# Altium PCB POWER.PcbDoc
Units mm, origin at the board's own origin, x right, y up, seen from the top; angles counter-clockwise.
Board outline 152.4 x 101.6 mm, 2 copper layers (Top Layer, Bottom Layer); 27 components, 25 nets, 139 pads, 20 vias.
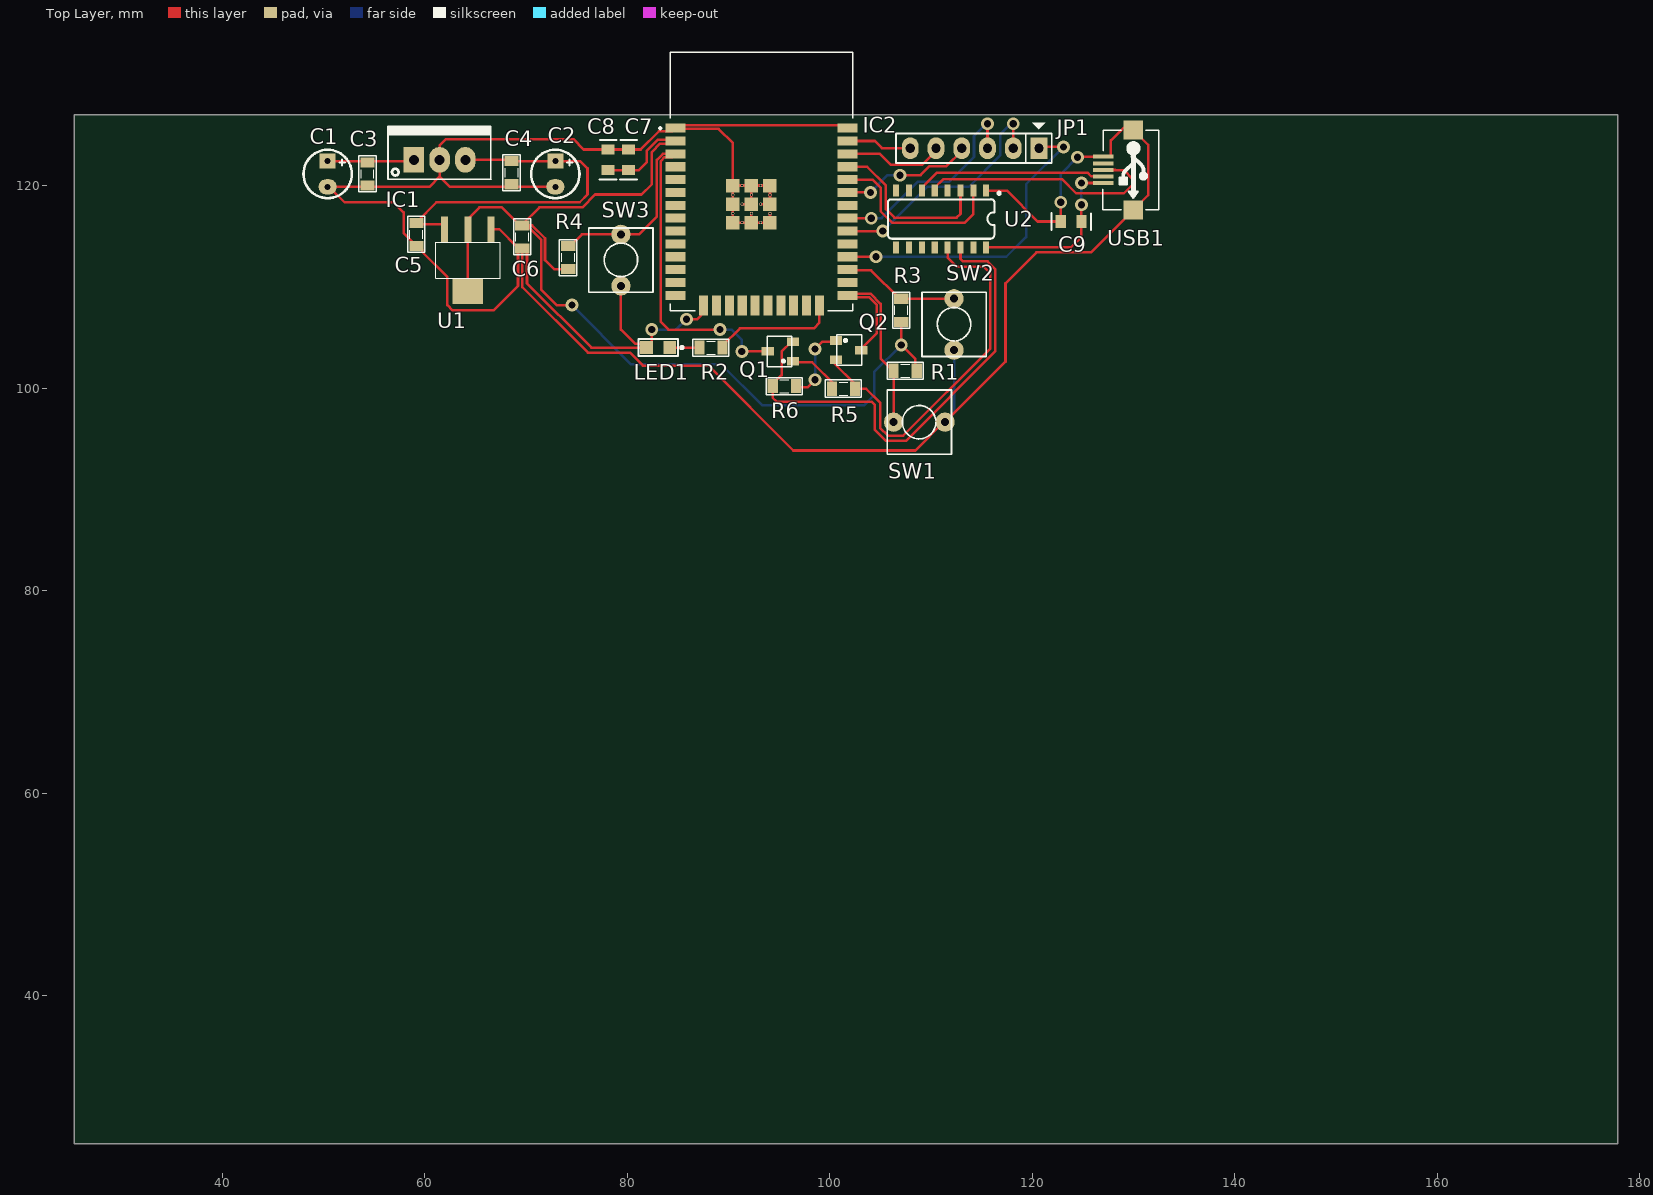
[diagram p0: Top Layer view]
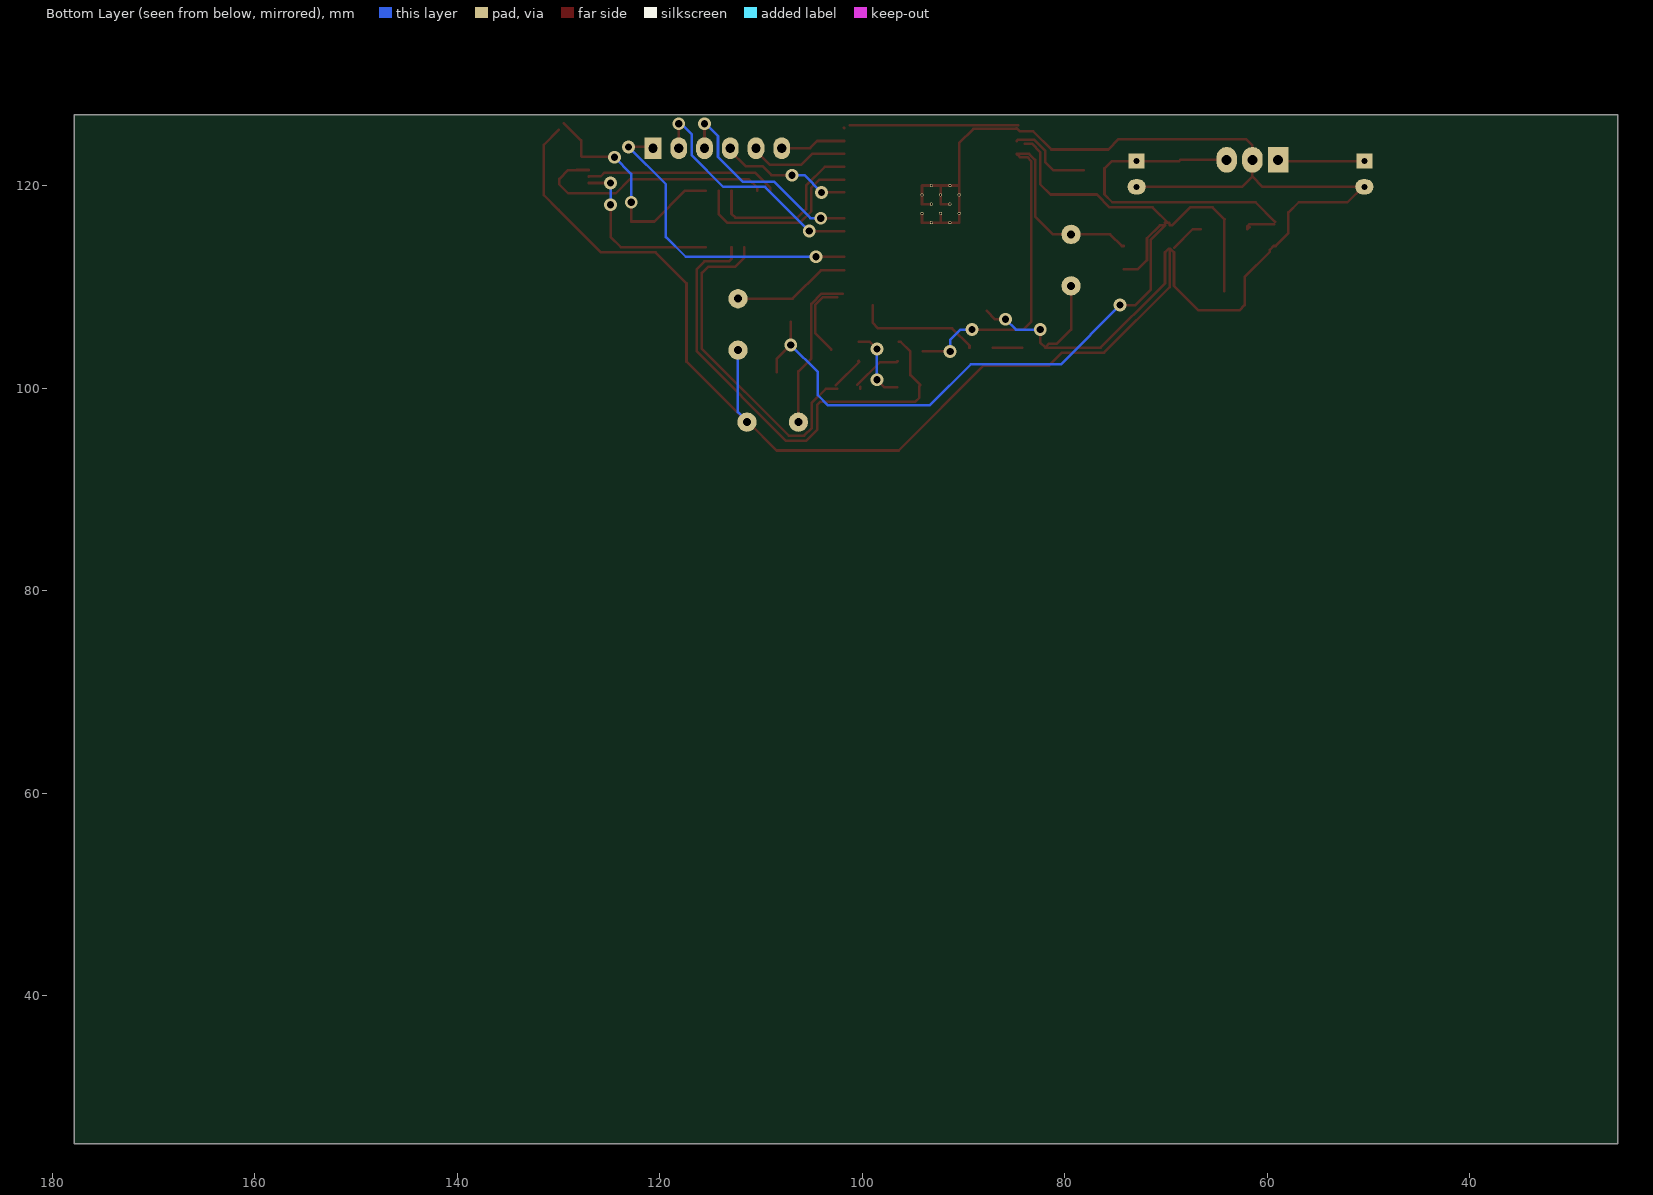
[diagram p1: Bottom Layer view, seen from below]
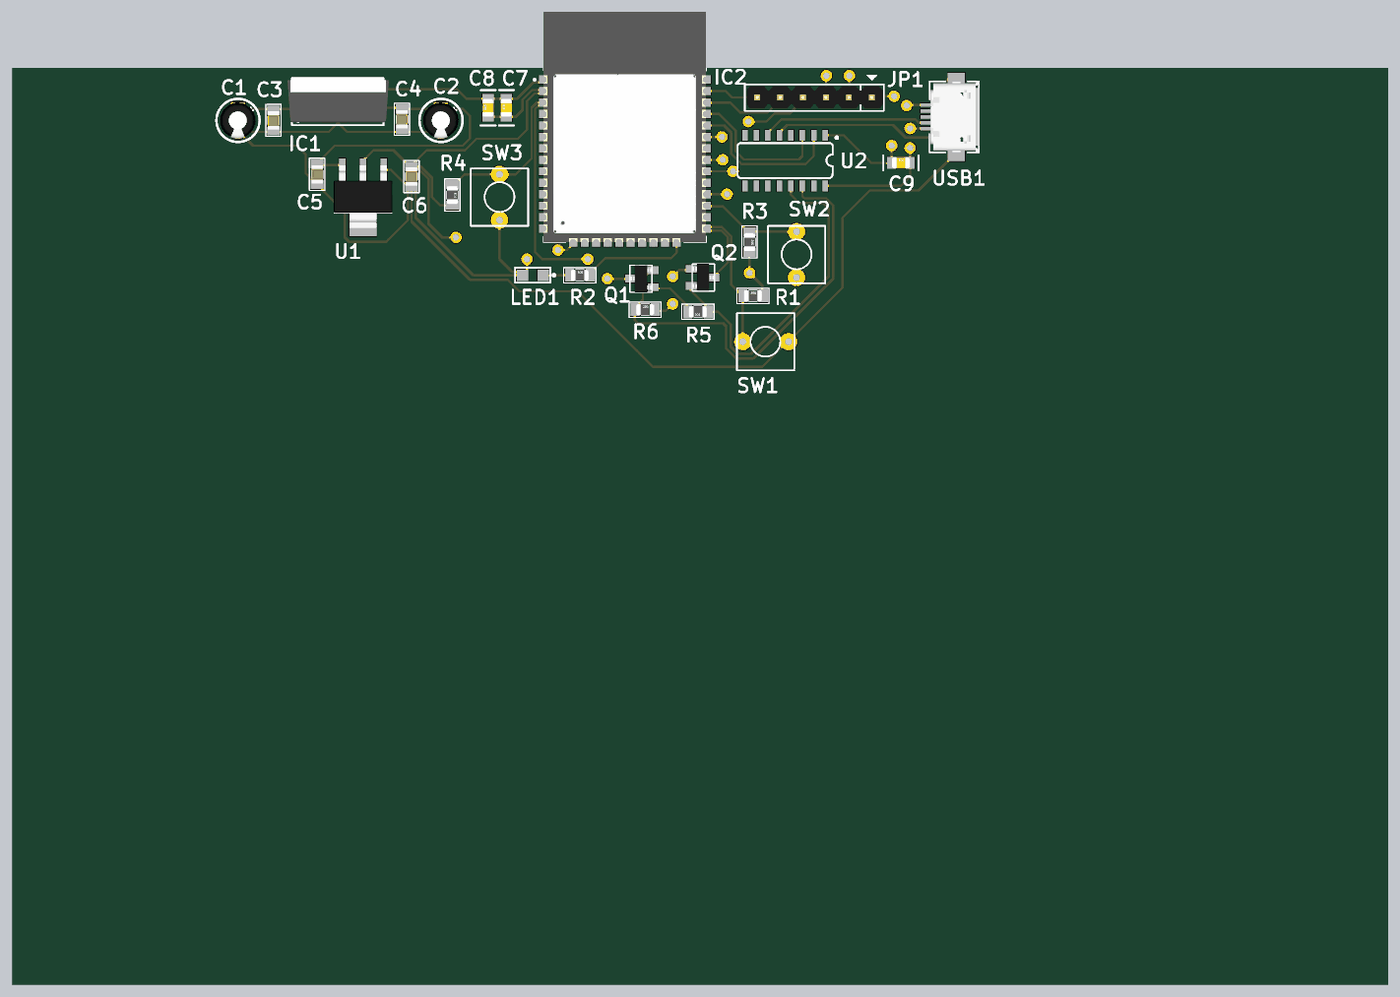
[diagram p2: 3D render of the assembled board from above, using the file's embedded part models]

## Layer stack, top to bottom
Top Solder: solder mask 0.0102, Solder Resist, Dk 3.5
Top Layer: signal copper 0.0356
Dielectric 1: dielectric 0.32, FR-4, Dk 4.8
Bottom Layer: signal copper 0.0356
Bottom Solder: solder mask 0.0102, Solder Resist, Dk 3.5

## Board outline
25.4,25.4 177.8,25.4 177.8,127 25.4,127

## Design rules (kind name [scope] priority, off if disabled: settings)
Clearance [All] p1: gap=0.254 ignorepadtopadclearanceinfootprint=FALSE except(0: Arc-Hole Track-Hole SMDPad-Hole THPad-Hole Via-Hole Fill-Hole Poly-Hole Region-Hole Text-Hole)
DiffPairsRouting [All] p1: maxlimit=0.254 minlimit=0.254 mostfreqgap=0.254 toplayer_minwidth=0.381 toplayer_maxwidth=0.381 toplayer_prefwidth=0.381 bottomlayer_minwidth=0.381 bottomlayer_maxwidth=0.381 bottomlayer_prefwidth=0.381 maxuncoupledlength=12.7
PolygonConnect [All] p1: connectstyle=Relief reliefconductorwidth=0.254 reliefentries=4 polygonreliefangle="90 Angle" airgapwidth=0.254
RoutingVias [All] p1: holewidth=0.711 width=1.27 viastyle="Through Hole" minholewidth=0.711 minwidth=1.27 maxholewidth=0.711 maxwidth=1.27
SolderMaskExpansion [All] p1: expansion=0.102 istentingtop=FALSE
Width [All] p1: maxlimit=0.254 minlimit=0.254 preferedwidth=0.254
29 further rules are at their usual default settings.

## Classes and differential pairs
differential pair class diff: D0
component class MCU: C7 C8 C9 IC2 JP1 LED1 Q1 Q2 R1 R2 R3 R4 R5 R6 SW1 SW2 SW3 U2 USB1
component class POWER: C1 C2 C3 C4 C5 C6 IC1 U1
differential pair D0: +D0_P -D0_N

## Components (designator, comment, footprint, x,y, rotation, side; value= is the part's Value field where it differs from the comment)
C1 "25V/10uF" C3MM 50.419,121.158 r270 top
C2 "10V/1uF" C3MM 72.898,121.158 r270 top
C3 "100nF" CAP_0805 54.356,121.158 r270 top value=33p
C4 "100nF" CAP_0805 68.58,121.285 r270 top value=33p
C5 "10uF" CAP_0805 59.182,115.189 r270 top value=33p
C6 "22uF" CAP_0805 69.632,114.935 r270 top value=33p
C7 "10uF" C0805 80.137,122.555 r90 top value=33p
C8 "10uF" C0805 78.105,122.555 r90 top value=33p
C9 "100nF" C0805 123.825,116.459 r0 top value=33p
IC1 "LM7805" QTO-220 58.928,122.555 r0 top
IC2 "ESP32-WROOM-32" MODULE_ESP32-WROOM-32 93.259,120.42 r0 top
JP1 "JP6 PIN" JP6 120.65,123.698 r180 top value=JP7
LED1 "LED" LED0805 83.058,104.013 r180 top value="LED 3 ly Single Colour"
Q1 "C1815" SOT23D 95.123,103.632 r90 top
Q2 "C1815" SOT23D 101.854,103.759 r270 top
R1 "10k" RES-SMD-0805 107.442,101.727 r0 top
R2 "Resistor - SMD" RES-SMD-0805 88.265,104.013 r0 top
R3 "10k" RES-SMD-0805 107.061,107.696 r270 top
R4 "10k" RES-SMD-0805 74.168,112.903 r270 top
R5 "10k" RES-SMD-0805 101.346,99.949 r180 top
R6 "10k" RES-SMD-0805 95.504,100.203 r0 top
SW1 "SW" SW2 106.299,96.647 r0 top value="SW chip 2 pin"
SW2 "SW" SW2 112.268,108.839 r270 top value="SW chip 2 pin"
SW3 "SW" SW2 79.375,115.189 r270 top value="SW chip 2 pin"
U1 "LM1117-ADJ" LM1117-SOP 64.262,114.427 r180 top
U2 "CH340C" SOP-16 110.998,116.707 r180 top
USB1 "USB" USB-M1 127,121.554 r270 top

## Footprints (in the part's own frame and the unit in brackets; to place one, negate y for a bottom-side part, rotate by r counter-clockwise, add the part's x,y. Pads: shape width x height; smd on the part's side, far side on the other; paste and mask are expansions set on the pad)
C3MM [mm]
  rect 1.5x1.58 hole 0.6: 1(-1.27,0)
  oval 1.5x1.8 hole 0.6: 2(1.27,0)
  silkscreen extent -2.39,-2.39 2.39,2.39, body extent -2,-2.03 1.99,1.97, height 7.01
C0805 [mm] "Chip Resistor; Body 2.0 x 1.3 mm (LxW typ)"
  rect 1x1.27 smd: 1(-1.016,0) 2(1.016,0)
  silkscreen extent -1.96,-0.84 1.96,0.84, body extent -1,-0.62 1,0.63, height 0.78
CAP_0805 [mil]
  rect 39.37x55 smd: 1(-45,0) 2(45,0)
  silkscreen extent -70,-34 70,33, body extent -40,-25 40,25, height 24
JP6 [mil] "JP6"
  rect 65x85 hole 36: 1(0,0)
  oval 65x85 hole 36: 2(100,0) 3(200,0) 4(300,0) 5(400,0) 6(500,0)
  silkscreen extent -50,-99 556,58, body extent -48,-50 548,48, height 323
LED0805 [mil] "Chip Resistor; Body 2.0 x 1.3 mm (LxW typ)"
  rect 50x50 smd: 1(-45,0) 2(45,0)
  silkscreen extent -97,-33 77,33, body extent -60,-25 60,25, height 47
LM1117-SOP [mm]
  rect 0.7x2.54 smd: 1(-2.3,-1.27) 2(0,-1.27) 3(2.3,-1.27)
  rect 3x2.54 smd: 2(0,4.826)
  silkscreen extent -3.18,0 3.17,3.56, body extent -3.25,-1.78 3.25,5.18, height 1.68
MODULE_ESP32-WROOM-32 [mm]
  rect 2x0.9 smd: 1(-8.5,5.26) 2(-8.5,3.99) 3(-8.5,2.72) 4(-8.5,1.45) 5(-8.5,0.18) 6(-8.5,-1.09) 7(-8.5,-2.36) 8(-8.5,-3.63) 9(-8.5,-4.9) 10(-8.5,-6.17) 11(-8.5,-7.44) 12(-8.5,-8.71) 13(-8.5,-9.98) 14(-8.5,-11.25) 25(8.5,-11.25) 26(8.5,-9.98) 27(8.5,-8.71) 28(8.5,-7.44) 29(8.5,-6.17) 30(8.5,-4.9) 31(8.5,-3.63) 32(8.5,-2.36) 33(8.5,-1.09) 34(8.5,0.18) 35(8.5,1.45) 36(8.5,2.72) 37(8.5,3.99) 38(8.5,5.26)
  rect 0.9x2 smd: 15(-5.715,-12.25) 16(-4.445,-12.25) 17(-3.175,-12.25) 18(-1.905,-12.25) 19(-0.635,-12.25) 20(0.635,-12.25) 21(1.905,-12.25) 22(3.175,-12.25) 23(4.445,-12.25) 24(5.715,-12.25)
  rect 1.33x1.33 smd: 39_1(-2.835,-0.405) 39_2(-1,-0.405) 39_3(0.835,-0.405) 39_4(-2.835,-2.24) 39_5(-1,-2.24) 39_6(0.835,-2.24) 39_7(-2.835,-4.075) 39_8(-1,-4.075) 39_9(0.835,-4.075)
  round 0.3 hole 0.2: 39_10(-1.917,-0.405) 39_11(-0.082,-0.405) 39_12(-2.835,-1.322) 39_13(-1,-1.322) 39_14(0.835,-1.322) 39_15(-1.917,-2.24) 39_16(-0.082,-2.24) 39_17(-2.835,-3.157) 39_18(-1,-3.157) 39_19(0.835,-3.157) 39_20(-1.917,-4.075) 39_21(-0.082,-4.075)
  silkscreen extent -10.1,-12.75 9,12.75, body extent -9.02,-12.75 8.98,12.75, height 3.2
QTO-220 [mil] "TO-220 - 1-2-3"
  rect 80x100 hole 39: 1(0,0)
  oval 80x100 hole 39: 2(100,0) 3(200,0)
  silkscreen extent -100,-76 300,130, body extent -119,-64 322,121, height 755
RES-SMD-0805 [mil]
  rect 39.37x55 smd: 1(-45,0) 2(45,0)
  silkscreen extent -70,-34 70,33, body extent -39,-25 39,25, height 31
SOP-16 [mm]
  rect 0.6x1.2 smd: 1(-4.445,-2.8) 2(-3.175,-2.8) 3(-1.905,-2.8) 4(-0.635,-2.8) 5(0.635,-2.8) 6(1.905,-2.8) 7(3.175,-2.8) 8(4.445,-2.8) 9(4.445,2.8) 10(3.175,2.8) 11(1.905,2.8) 12(0.635,2.8) 13(-0.635,2.8) 14(-1.905,2.8) 15(-3.175,2.8) 16(-4.445,2.8)
  silkscreen extent -5.84,-2.67 5.26,1.95, body extent -4.95,-3.47 4.95,3.47, height 1.75
SOT23D [mm] "SOT 23C - 1-3-2 - BCE"
  rect 0.85x1.2 smd: 1(-0.95,-1.25) 2(0.94,-1.245) 3(0,1.25)
  silkscreen extent -1.5,-1.14 1.5,1.32, body extent -1.5,-1.17 1.5,1.33, height 1.06
SW2 [mil] "SW button 2pin, 250x 250 mil"
  round 75 hole 31: 1(0,0) 2(200,0)
  silkscreen extent -25,-125 225,125
USB-M1 [mm]
  rect 0.4x2 smd: 1(1.3,0) 2(0.65,0) 3(0,0) 4(-0.65,0) 5(-1.321,0)
  rect 1.9x1.9 smd: 5(-3.95,2.968) 5(3.95,2.968)
  silkscreen extent -3.94,-0.03 3.94,5.46, body extent -3.98,0.11 4,5.54, height 2.71

## Part data
C1 C2: library part "Cap Pol", "Polarized Capacitor (Axial)", LatestRevisionDate=17-Jul-2002, LatestRevisionNote="Re-released for DXP Platform.", PackageReference=POLAR0.8, Published=8-Jun-2000, Publisher="Altium Limited"
C3 C4 C5 C6 C7 C8 C9: library part CapSMD, "Capacitor", LatestRevisionDate=17-Jul-2002, LatestRevisionNote="Re-released for DXP Platform.", PackageReference=RAD-0.3, Published=8-Jun-2000, Publisher="Altium Limited"
IC1: library part LM78xx, "On ap +, from + 5 to + 24VDC"
IC2: "Bluetooth, WiFi Transceiver Module 2.4GHz ~ 2.5GHz Surface Mount", Package="Module Espressif Systems", Digi-Key_Part_Number=1904-1010-1-ND, Digi-Key_Purchase_URL=https://www.digikey.com/product-detail/en/espressif-systems/ESP32-WROOM-32/1904-1010-1-ND/8544305?utm_source=snapeda&utm_medium=aggregator&utm_campaign=symbol, MF="Espressif Systems", MP=ESP32-WROOM-32, SnapEDA_Link=https://www.snapeda.com/parts/ESP32-WROOM-32/Espressif%20Systems/view-part/2753322/?ref=snap
JP1: library part JP6
LED1: "LED Single colour Green and Red"
Q1 Q2: library part 2SC1815, "NPN 600mW, ECB"
R1 R3 R4 R5 R6: library part "Resistor - SMD", "Resistor", Manufacturer="Generic Components", Class=Passive, Published=08/06/2000, Publisher="Altium Hobart Technology Centre"
R2: "Resistor SMD", Manufacturer="Generic Components", Class=Passive, Published=08/06/2000, Publisher="Altium Hobart Technology Centre"
SW1 SW2 SW3: library part SW2, "Switch button 2 pin"
U1: "800mA Low-Dropout Linear Regulator", Creator="Nguyen Ba Bien", Website=http://group3i.net
U2: "USB to serial chip CH340", Package=Package, Availability=Unavailable, Check_prices=https://www.snapeda.com/parts/CH340C/WCH/view-part/5428851/?ref=eda, MF=WCH, MP=CH340C, Price=None, SnapEDA_Link=https://www.snapeda.com/parts/CH340C/WCH/view-part/5428851/?ref=snap
USB1: library part USB-M

## Via types
v1: diameter 1.27, hole 0.711, Top Layer to Bottom Layer, 20 vias

## Nets (pads, with @x,y where several pads share a name; then routed paths per layer and width w, separated by ;. In a path a pad name is that pad's centre, name@x,y a point inside that pad or via, vN(x,y) a via of type N, cw(c..) or ccw(c..) an arc to the next point about the centre after c; other vN are vias at no path point)
3V3: C6.1 C7.1 C8.1 IC2.2 R1.2 R3.2 R4.2 U1.2 | length 106.1
  Top Layer w0.254: U1.2@64.214,116.665 65.405,117.856 67.62,117.856 C6.1@69.37,116.106 ; U1.2@64.262,109.601 64.262,115.697 U1.2@64.262,116.617 ; C6.1@69.37,116.078 C6.1 ; C6.1@69.632,116.169 71.318,117.856 75.565,117.856 76.835,119.126 81.407,119.126 82.423,120.142 82.423,123.317 83.248,124.142 IC2.2@83.965,124.142 ; C6.1@69.667,116.332 70.14,116.332 C6.1@70.083,116.389 ; R4.2 72.771,111.76 71.882,112.649 71.882,114.808 70.612,116.078 70.104,116.078 71.501,114.681 71.501,109.728 73.025,108.204 74.295,108.204 74.422,108.331 v1(74.549,108.204) ; C8.1 C7.1 81.153,121.539 81.915,122.301 81.915,123.444 82.995,124.523 84.645,124.523 IC2.2 ; R3.2 v1(107.061,104.267) 108.458,102.87 R1.2@108.458,101.6
  Bottom Layer w0.254: v1(74.549,108.204) 80.391,102.362 89.281,102.362 93.345,98.298 103.378,98.298 104.385,99.305 104.385,101.591 v1(107.061,104.267)
5V: C2.1 C4.1 C5.1 IC1.3 U1.3 | length 36.3
  Top Layer w0.254: C5.1@59.218,116.423 61.158,118.364 75.311,118.364 76.073,119.126 76.073,121.71 75.355,122.428 C2.1 68.707,122.428 68.58,122.555 IC1.3 ; C5.1@59.309,116.205 61.739,116.205 61.962,115.982 U1.3 U1.3@61.744,115.915
12V: C1.1 C3.1 IC1.1 | length 8.4
  Top Layer w0.254: C1.1@50.546,122.428 54.673,122.428 58.801,122.428 IC1.1
D0_N: U2.5 USB1.3 | length 25
  Top Layer w0.254: U2.5 110.363,119.807 111.206,120.65 122.936,120.65 124.333,119.253 129.032,119.253 129.921,120.142 129.921,120.681 ; USB1.3 127.005,121.548 128.184,121.548 128.194,121.539 129.032,121.539 129.906,120.665
D0_P: U2.6 USB1.2 | length 19
  Top Layer w0.254: U2.6 109.093,119.807 110.571,121.285 125.44,121.285 125.816,120.909 126.995,120.909 USB1.2
DTR: Q2.2 R5.1 U2.13 | length 37
  Top Layer w0.254: Q2.2@100.277,102.614 R5.1@102.616,100.274 ; Q2.2@100.355,102.692 Q2.2@100.403,102.645 ; R5.1 103.588,99.949 104.965,98.572 104.965,96.095 105.747,95.313 107.251,95.313 115.824,103.886 115.824,111.379 115.189,112.014 112.522,112.014 111.633,112.903 U2.13
EN: IC2.3 Q1.3 R4.1 SW3.1 | length 47.8
  Top Layer w0.254: R4.1 74.366,114.046 75.509,115.189 SW3.1 81.153,115.189 82.931,116.967 82.931,122.555 83.516,123.14 IC2.3 84.436,122.817 83.701,122.817 83.312,122.428 83.312,106.553 84.074,105.791 v1(89.154,105.791) ; v1(91.313,103.632) Q1.3@94,103.632
  Bottom Layer w0.254: v1(89.154,105.791) 90.297,105.791 91.313,104.775 v1(91.313,103.632)
GND: C1.2 C2.2 C3.2 C4.2 C5.2 C6.2 C7.2 C8.2 C9.1 IC1.2 IC2.1 IC2.15 IC2.38 IC2.39_1 IC2.39_2 IC2.39_3 IC2.39_4 IC2.39_5 IC2.39_6 IC2.39_7 IC2.39_8 IC2.39_9 IC2.39_10 IC2.39_11 IC2.39_12 IC2.39_13 IC2.39_14 IC2.39_15 IC2.39_16 IC2.39_17 IC2.39_18 IC2.39_19 IC2.39_20 IC2.39_21 LED1.2 SW1.2 SW2.2 SW3.2 U1.1 U2.1 USB1.5 | length 289.5
  Top Layer w0.254: C1.2 C1.2@50.569,119.888 ; U1.1 67.366,115.697 C6.2@69.179,113.883 ; C2.2 62.484,119.888 61.468,120.904 ; SW3.2 79.375,105.791 80.772,104.394 81.534,104.394 LED1.2 ; v1(82.423,105.791) 82.423,104.521 LED1.2 ; IC2.1@84.582,125.984 84.759,125.984 IC2.38@101.219,125.984 ; v1(85.852,106.807) 86.868,106.807 IC2.15@87.694,107.632 ; IC2.39_15 IC2.39_5 IC2.39_13 IC2.39_2 ; IC2.39_18 IC2.39_8 ; IC2.39_16 IC2.39_6 IC2.39_14 IC2.39_3 IC2.39_11 IC2.39_2 ; IC2.39_19 IC2.39_9 IC2.39_21 IC2.39_8 ; IC2.38 IC2.38@101.809,125.73 ; U2.1 117.475,119.507 120.523,116.459 C9.1 v1(122.809,118.364) ; v1(124.46,122.809) 124.493,122.842 126.967,122.842 127,122.875 127.689,122.875 127.762,122.948 127.762,124.46 USB1.5@129.476,126.174 ; USB1.5@129.968,125.504 131.445,124.027 131.445,119.081 129.968,117.604 125.775,113.411 120.396,113.411 117.348,110.363 117.348,102.616 SW1.2 111.252,96.647 108.458,93.853 96.393,93.853 88.011,102.235 81.534,102.235 80.264,103.505 76.109,103.505 69.632,109.982 C6.2 ; C1.2@50.569,119.888 60.452,119.888 61.468,120.904 ; C1.2@50.569,119.888 52.093,118.364 56.896,118.364 57.912,117.348 57.912,115.316 C5.2 59.38,114.046 59.753,113.673 59.753,113.474 62.23,110.998 62.23,108.204 62.738,107.696 66.802,107.696 69.215,110.109 69.215,113.419 69.588,113.792 C6.2 ; 61.468,120.904 IC1.2 61.468,123.952 62.103,124.587 74.676,124.587 75.692,123.571 C8.2 81.324,123.571 83.11,125.357 84.436,125.357 IC2.1 84.836,125.603 89.027,125.603 90.424,124.206 IC2.39_1 ; C6.2 69.731,113.792 70.104,113.419 70.104,110.363 76.454,104.013 LED1.2 ; IC2.39_1 IC2.39_12 IC2.39_4 IC2.39_17 IC2.39_7 IC2.39_20 IC2.39_8 ; IC2.39_1 IC2.39_10 IC2.39_2
  Bottom Layer w0.254: v1(82.423,105.791) 84.836,105.791 v1(85.852,106.807) ; SW1.2 111.379,96.755 112.268,97.644 SW2.2 ; 122.809,118.999 122.809,121.158 v1(124.46,122.809)
IO_0: IC2.25 Q2.3 R1.1 SW1.1 | length 23.3
  Top Layer w0.254: IC2.25@101.936,109.347 104.013,109.347 105.029,108.331 105.029,102.941 106.299,101.671 SW1.1 ; IC2.25@102.489,108.966 103.913,108.966 104.648,108.231 104.648,105.43 Q2.3@103.041,103.822
IO_2: IC2.24 R2.2 | length 12.4
  Top Layer w0.254: R2.2 89.408,104.211 91.115,105.918 98.425,105.918 98.974,106.467 IC2.24
IO_16: IC2.27 R3.1 SW2.1 | length 11.7
  Top Layer w0.254: IC2.27@101.759,111.633 104.069,111.633 106.863,108.839 R3.1 SW2.1
NetIC2_28: IC2.28 JP1.1 | length 31.3
  Top Layer w0.254: IC2.28 v1(104.571,112.98) ; JP1.1 120.777,123.825 v1(123.063,123.825)
  Bottom Layer w0.254: v1(104.571,112.98) 117.425,112.98 119.38,114.935 119.38,120.142 v1(123.063,123.825)
NetIC2_30: IC2.30 JP1.2 | length 24.4
  Top Layer w0.254: IC2.30 v1(105.233,115.52) ; JP1.2 v1(118.11,126.111)
  Bottom Layer w0.254: v1(105.233,115.52) 109.601,119.888 113.72,119.888 116.84,123.008 116.84,125.095 117.856,126.111 v1(118.11,126.111)
NetIC2_31: IC2.31 JP1.3 | length 21.3
  Top Layer w0.254: IC2.31 v1(104.09,116.79) ; JP1.3 v1(115.57,126.111)
  Bottom Layer w0.254: v1(104.09,116.79) 105.106,116.79 108.716,120.4 111.808,120.4 114.236,122.829 114.236,124.904 115.443,126.111 v1(115.57,126.111)
NetIC2_33: IC2.33 JP1.4 | length 13
  Top Layer w0.254: IC2.33 v1(104.013,119.33) ; v1(106.934,121.031) 108.966,121.031 109.855,121.92 111.506,121.92 JP1.4@113.03,123.444
  Bottom Layer w0.254: v1(104.013,119.33) 105.714,121.031 v1(106.934,121.031)
NetIC2_36: IC2.36 JP1.5 | length 9.8
  Top Layer w0.254: IC2.36 104.952,123.14 106.045,122.047 109.093,122.047 JP1.5@110.49,123.444
NetIC2_37: IC2.37 JP1.6 | length 6.5
  Top Layer w0.254: IC2.37 104.444,124.41 105.156,123.698 JP1.6
NetLED1_1: LED1.1 R2.1 | length 2.9
  Top Layer w0.254: LED1.1 R2.1
NetQ1_1: Q1.1 R5.2 | length 5.1
  Top Layer w0.254: Q1.1@96.5,102.682 96.621,102.561 98.266,102.561 R5.2@100.477,100.35 ; R5.2 R5.2@100.203,100.147
NetQ2_1: Q2.1 R6.2 | length 7.5
  Top Layer w0.254: R6.2@96.52,100.076 97.79,100.076 v1(98.552,100.838) ; v1(98.552,103.886) 99.248,104.582 Q2.1@100.35,104.582
  Bottom Layer w0.254: v1(98.552,100.838) v1(98.552,103.886)
RST: Q1.2 R6.1 U2.14 | length 48.3
  Top Layer w0.254: R6.1@94.262,100.302 95.253,101.293 95.253,103.632 96.193,104.572 Q1.2 ; R6.1 94.361,99.06 94.742,98.679 104.14,98.679 104.457,98.361 104.457,95.884 105.536,94.805 107.505,94.805 116.332,103.632 116.332,111.76 115.57,112.522 113.157,112.522 112.903,112.776 U2.14
RX: IC2.35 U2.3 | length 17
  Top Layer w0.254: IC2.35 103.678,121.87 105.537,120.011 105.537,117.685 106.382,116.84 112.522,116.84 112.903,117.221 U2.3
TX: IC2.34 U2.2 | length 18.2
  Top Layer w0.254: IC2.34 104.23,120.6 105.029,119.801 105.029,117.475 106.172,116.332 113.284,116.332 114.173,117.221 U2.2
V3: U2.4
VCC: C9.2 U2.16 USB1.1 | length 17.5
  Top Layer w0.254: U2.16 119.715,113.907 119.727,113.919 123.825,113.919 124.841,114.935 C9.2 v1(124.841,118.11) ; v1(124.841,120.269) 124.849,120.261 126.993,120.261 USB1.1
  Bottom Layer w0.254: v1(124.841,118.11) v1(124.841,120.269) v1@124.841,120.396
pads on no net: IC2.4 IC2.5 IC2.6 IC2.7 IC2.8 IC2.9 IC2.10 IC2.11 IC2.12 IC2.13 IC2.14 IC2.16 IC2.17 IC2.18 IC2.19 IC2.20 IC2.21 IC2.22 IC2.23 IC2.26 IC2.29 IC2.32 U2.7 U2.8 U2.9 U2.10 U2.11 U2.12 U2.15 USB1.4

## Text inside footprints (layer, text, board x,y; h text height)
IC2: Mechanical 13 "ANTENNA" at 87.259,129.42 h1.78